# Altium PCB WX0.012.992PCB-4.2.PcbDoc
Units mil, origin at the board's own origin, x right, y up, seen from the top; angles counter-clockwise.
Board outline 2570 x 3580 mil, 2 copper layers (Top Layer, Bottom Layer); 28 components, 15 nets, 53 pads, 151 vias.
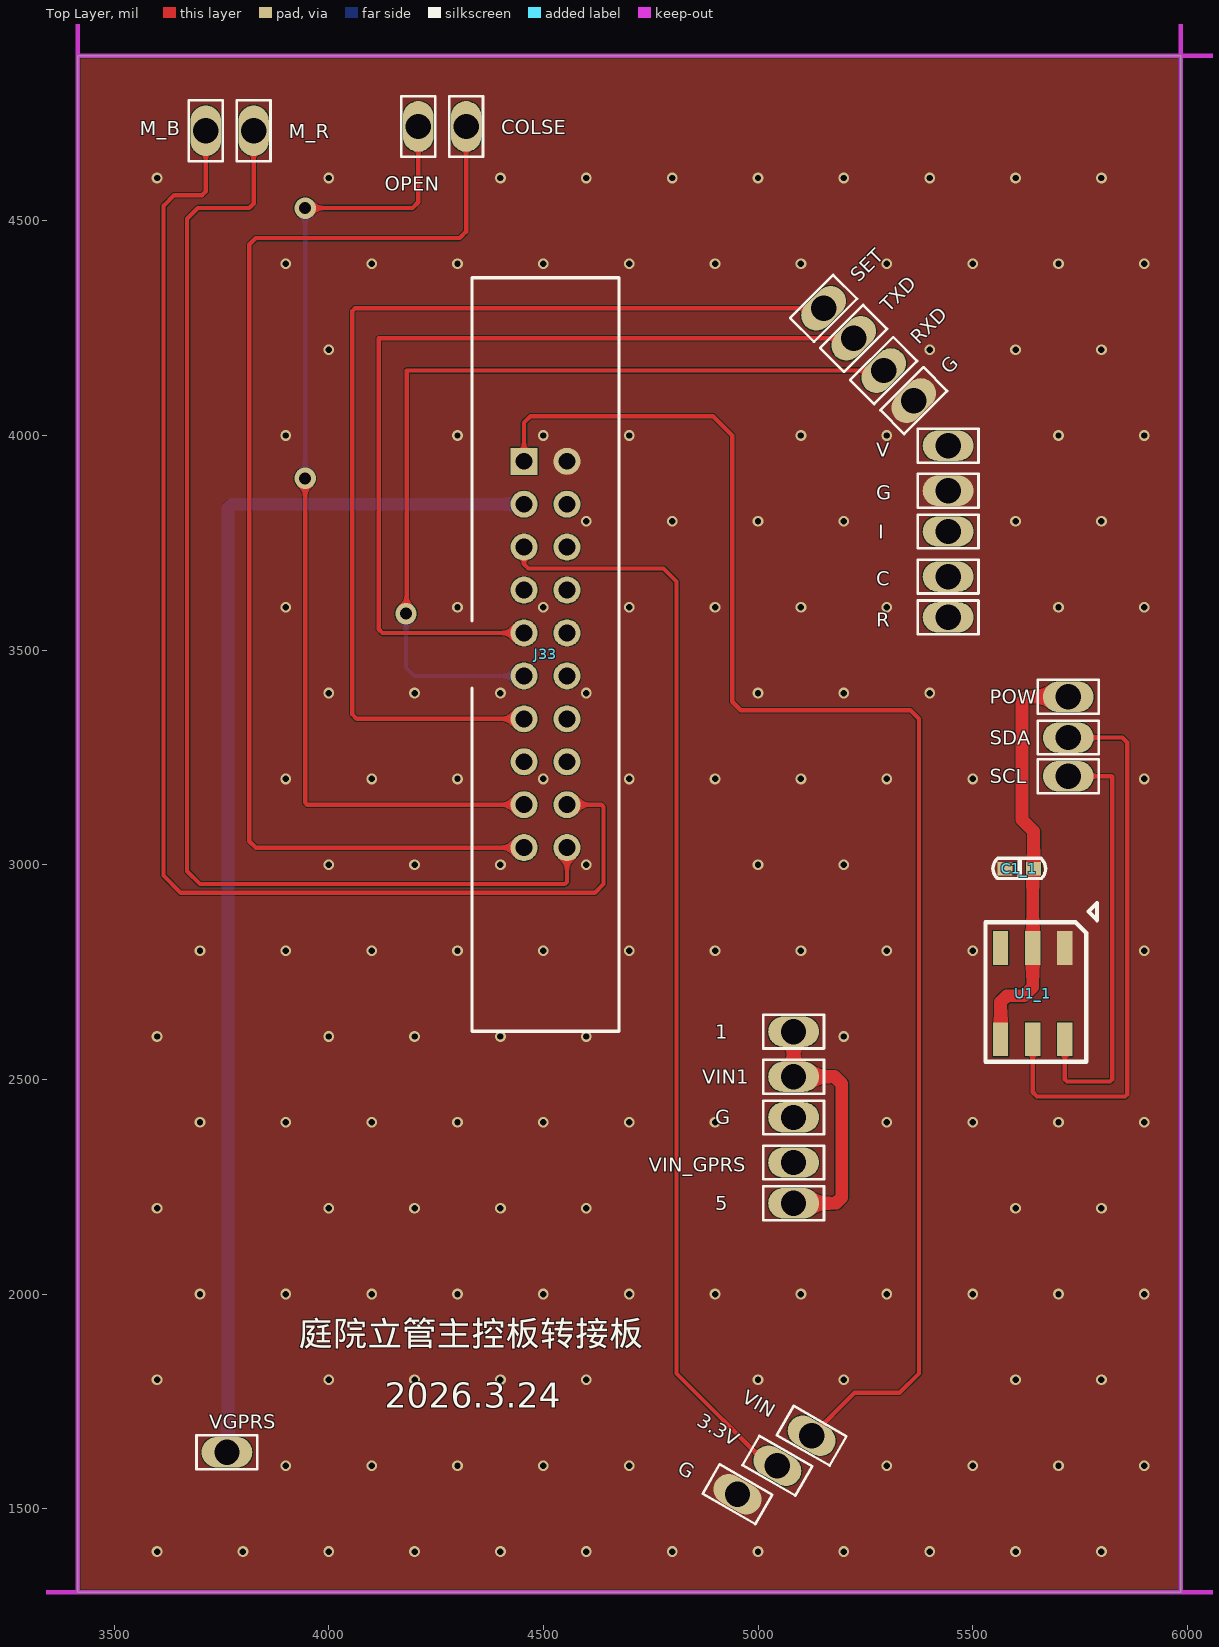
[diagram p0: Top Layer view]
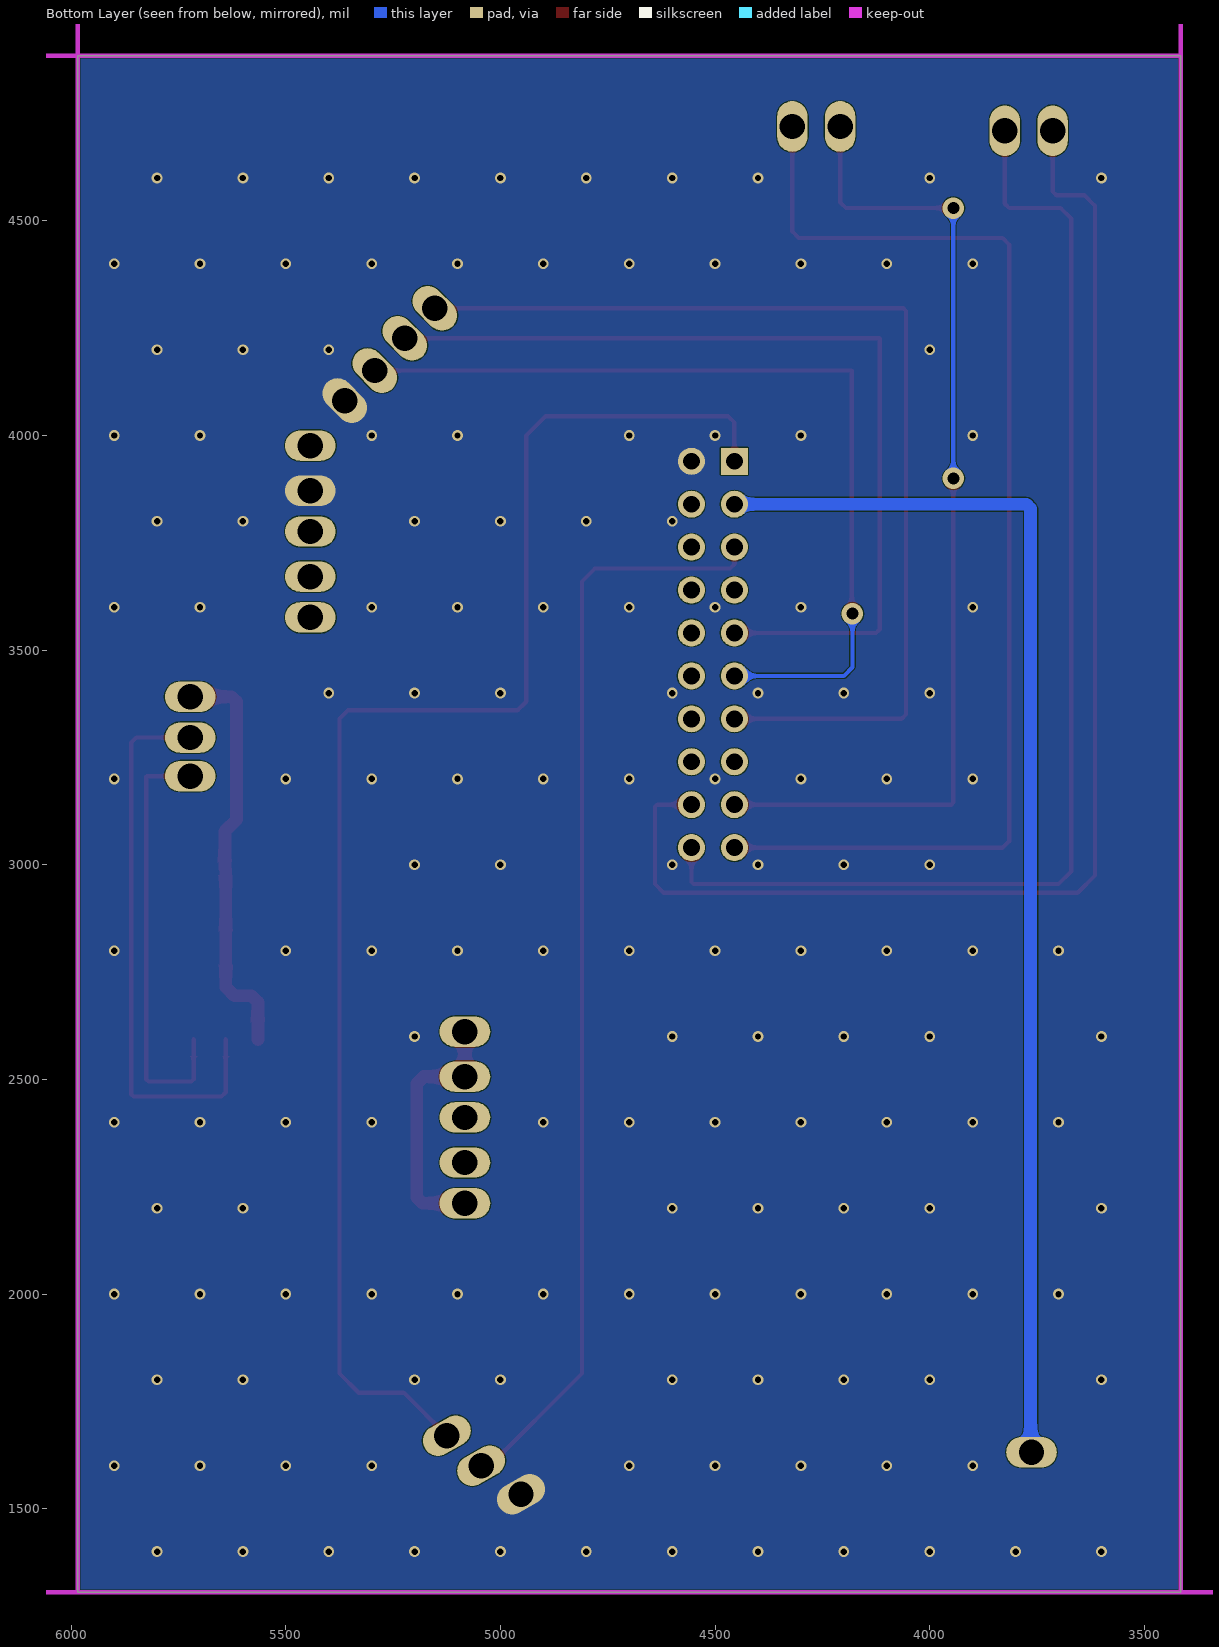
[diagram p1: Bottom Layer view, seen from below]

## Layer stack, top to bottom
Top Solder: solder mask 0.4, Solder Resist, Dk 3.5
Top Layer: signal copper 1.4
Dielectric 1: dielectric 12.6, FR-4, Dk 4.8
Bottom Layer: signal copper 1.4
Bottom Solder: solder mask 0.4, Solder Resist, Dk 3.5

## Board outline
3415,1305 5985,1305 5985,4885 3415,4885

## Design rules (kind name [scope] priority, off if disabled: settings)
Clearance [All] p1: gap=2 ignorepadtopadclearanceinfootprint=FALSE
ComponentClearance [All] p1: gap=2 collisioncheckmode=3 verticalgap=2 showdistances=FALSE
HoleToHoleClearance [All] p1: gap=2 allowstackedmicrovias=TRUE
MinimumSolderMaskSliver [All] p1: minsoldermaskwidth=2
PlaneConnect [All] p1: planeconnectstyle=Direct reliefexpansion=20 reliefentries=4 reliefconductorwidth=10 reliefairgap=10
PolygonConnect [All] p1: connectstyle=Direct reliefconductorwidth=10 reliefentries=4 polygonreliefangle="90 Angle" airgapwidth=10
RoutingVias [All] p1: holewidth=13.78 width=19.68 viastyle="Through Hole" minholewidth=13.78 minwidth=19.68 maxholewidth=28 maxwidth=50
SilkToSilkClearance [All] p1: silktosilkclearance=0
SilkToSolderMaskClearance [IsPad] p1: minsilkscreentomaskgap=0 clearancetoexposedcopper=TRUE
SolderMaskExpansion [All] p1: expansion=4
Width [All] p1: maxlimit=50 minlimit=10 preferedwidth=10
24 further rules are at their usual default settings.

## Components (designator, comment, footprint, x,y, rotation, side; value= is the part's Value field where it differs from the comment)
1 "Test Point" TP5 5082.8,2611.39 r90 top (schematic designator TP7)
3.3V "Test Point" TP5 5045,1600 r60 top (schematic designator TP7)
5 "Test Point" TP5 5082.8,2211.39 r90 top (schematic designator TP7)
C "Test Point" TP5 5442.8,3671.39 r90 top (schematic designator TP7)
C1_1 "100N/50V" CAP0603 5641.51,2991 r180 top (schematic designator C1)
COLSE "Test Point" TP5 4320,4720 r180 top (schematic designator TP7)
G "Test Point" TP5 5362.8,4081.39 r315 top (schematic designator TP7)
G "Test Point" TP5 5442.8,3871.39 r90 top (schematic designator TP7)
G "Test Point" TP5 5082.8,2411.39 r90 top (schematic designator TP7)
G "Test Point" TP5 4952.2,1533.62 r60 top (schematic designator TP7)
I "Test Point" TP5 5442.8,3776.39 r90 top (schematic designator TP7)
J33 "20Pin" DC254_2*10 4505,3490 r0 top
M_B "Test Point" TP5 3713.61,4710 r180 top (schematic designator TP7)
M_R "Test Point" TP5 3825,4710 r180 top (schematic designator TP7)
OPEN "Test Point" TP5 4208.61,4720 r180 top (schematic designator TP7)
POW "Test Point" TP5 5722.8,3391.39 r90 top (schematic designator TP7)
R "Test Point" TP5 5442.8,3576.39 r90 top (schematic designator TP7)
RXD "Test Point" TP5 5292.8,4151.39 r315 top (schematic designator TP7)
SCL "Test Point" TP5 5722.8,3206.39 r90 top (schematic designator TP7)
SDA "Test Point" TP5 5722.8,3296.39 r90 top (schematic designator TP7)
SET "Test Point" TP5 5152.8,4296.39 r315 top (schematic designator TP7)
TXD "Test Point" TP5 5222.8,4226.39 r315 top (schematic designator TP7)
U1_1 "HP6862I" HP6862 5640,2699.7 r180 top (schematic designator U1)
V "Test Point" TP5 5442.8,3976.39 r90 top (schematic designator TP7)
VGPRS "Test Point" TP5 3762.8,1631.38 r90 top (schematic designator TP7)
VIN "Test Point" TP5 5125,1670 r60 top (schematic designator TP7)
VIN1 "Test Point" TP5 5082.8,2506.39 r90 top (schematic designator TP7)
VIN_GPRS "Test Point" TP5 5082.8,2306.39 r90 top (schematic designator TP7)

## Footprints (in the part's own frame and the unit in brackets; to place one, negate y for a bottom-side part, rotate by r counter-clockwise, add the part's x,y. Pads: shape width x height; smd on the part's side, far side on the other; paste and mask are expansions set on the pad)
CAP0603 [mil]
  rect 35x31 smd: 1(-0.49,0) 2(66.51,0)
  silkscreen extent -29,-24 94,23, body extent 1,-15 72,15, height 20
DC254_2*10 [mm]
  rect 1.6x1.6 hole 1: 1(-1.27,11.43)
  round 1.6 hole 1: 2(1.27,11.43) 3(-1.27,8.89) 4(1.27,8.89) 5(-1.27,6.35) 6(1.27,6.35) 7(-1.27,3.81) 8(1.27,3.81) 9(-1.27,1.27) 10(1.27,1.27) 11(-1.27,-1.27) 12(1.27,-1.27) 13(-1.27,-3.81) 14(1.27,-3.81) 15(-1.27,-6.35) 16(1.27,-6.35) 17(-1.27,-8.89) 18(1.27,-8.89) 19(-1.27,-11.43) 20(1.27,-11.43)
  silkscreen extent -4.35,-22.3 4.35,22.3
HP6862 [mm]
  rect 0.9x2 smd: 1(-1.9,-2.7) 2(0,-2.7) 3(1.9,-2.7) 4(1.9,2.7) 5(0,2.7) 6(-1.9,2.7)
  silkscreen extent -3.8,-5.37 2.8,4.03
TP5 [mm]
  oval 1.8x3 hole 1.5: 1(0,0)
  silkscreen extent -1,-1.8 1,1.8

## Part data
1 3.3V 5 C COLSE G G G G I M_B M_R OPEN POW R RXD SCL SDA SET TXD V VGPRS VIN VIN1 VIN_GPRS: library part "Test Point  PASS", "测试点"
C1_1: "100N/50V，±10%，0603", Part Name=0603贴片电容, Part Number=101020103-0021, ID=34
J33: library part 1010902-0139, "DC2 2.54mm 2x10pin,2.54mm间距，2x10pin，32×8.55×27.5mm,母头,双排,双排牛角座", Part Name=DC牛角座, ID=4, Part Number=1010902-0139, SMD/DIP=DIP

## Via types
v1: diameter 25, hole 15, Top Layer to Bottom Layer, tented both sides, 148 vias
v2: diameter 50, hole 28, Top Layer to Bottom Layer, tented both sides, 3 vias

## Nets (pads, with @x,y where several pads share a name; then routed paths per layer and width w, separated by ;. In a path a pad name is that pad's centre, name@x,y a point inside that pad or via, vN(x,y) a via of type N, cw(c..) or ccw(c..) an arc to the next point about the centre after c; other vN are vias at no path point)
3.3v: 3.3V.1 J33.5 | length 2580.6
  Top Layer w10: J33.5 4455,3700 4465,3690 4780,3690 4810,3660 4810,1815 5025,1600 3.3V.1
CLOSE: COLSE.1 J33.19 | length 2798.6
  Top Layer w10: COLSE.1 4320,4475 4305,4460 3830,4460 3815,4445 3815,3055 3830,3040 J33.19
GND: C1_1.2 G.1@4952.2,1533.62 G.1@5362.8,4081.39 G.1@5442.8,3871.39 J33.2 U1_1.1
  other v1: 3600,1400 3800,1400 4000,1400 4200,1400 4400,1400 4600,1400 4800,1400 5000,1400 5200,1400 5400,1400 5600,1400 5800,1400 3900,1600 4100,1600 4300,1600 4500,1600 4700,1600 5300,1600 5500,1600 5700,1600 5900,1600 3600,1800 4000,1800 4200,1800 4400,1800 4600,1800 5000,1800 5200,1800 5600,1800 5800,1800 3700,2000 3900,2000 4100,2000 4300,2000 4500,2000 4700,2000 4900,2000 5100,2000 5300,2000 5500,2000 5700,2000 5900,2000 3600,2200 4000,2200 4200,2200 4400,2200 4600,2200 5600,2200 5800,2200 3700,2400 3900,2400 4100,2400 4300,2400 4500,2400 4700,2400 4900,2400 5300,2400 5500,2400 5700,2400 5900,2400 3600,2600 4000,2600 4200,2600 4400,2600 4600,2600 5200,2600 3700,2800 3900,2800 4100,2800 4300,2800 4500,2800 4700,2800 4900,2800 5100,2800 5300,2800 5500,2800 5900,2800 4000,3000 4200,3000 4400,3000 4600,3000 5000,3000 5200,3000 3900,3200 4100,3200 4300,3200 4500,3200 4700,3200 4900,3200 5100,3200 5300,3200 5500,3200 5900,3200 4000,3400 4200,3400 4400,3400 4600,3400 5000,3400 5200,3400 5400,3400 3900,3600 4300,3600 4500,3600 4700,3600 4900,3600 5100,3600 5300,3600 5700,3600 5900,3600 4600,3800 4800,3800 5000,3800 5200,3800 5600,3800 5800,3800 3900,4000 4300,4000 4500,4000 4700,4000 5100,4000 5300,4000 5700,4000 5900,4000 4000,4200 5400,4200 5600,4200 5800,4200 3900,4400 4100,4400 4300,4400 4500,4400 4700,4400 4900,4400 5100,4400 5300,4400 5500,4400 5700,4400 5900,4400 3600,4600 4000,4600 4400,4600 4600,4600 4800,4600 5000,4600 5200,4600 5400,4600 5600,4600 5800,4600
M_B: J33.18 M_B.1 | length 3130.8
  Top Layer w10: M_B.1 3713.61,4568.61 3705,4560 3640,4560 3615,4535 3615,2975 3655,2935 4620,2935 4640,2955 4640,3135 4635,3140 J33.18
M_R: J33.20 M_R.1 | length 2839
  Top Layer w10: M_R.1 3825,4540 3815,4530 3695,4530 3670,4505 3670,2985 3700,2955 4550,2955 4555,2960 J33.20
OPEN: J33.17 OPEN.1 | length 2342.7
  Top Layer w10: v2(3945,3900) 3945,3145 3950,3140 J33.17 ; v2(3945,4530) 4195,4530 4208.61,4543.61 OPEN.1
  Bottom Layer w10: v2(3945,3900) v2(3945,4530)
POW: C1_1.1 POW.1 U1_1.2 U1_1.4 | length 965.5
  Top Layer w30: U1_1.4 5565.2,2680.2 5580,2695 5620,2695 5640,2715 U1_1.2 5640,2989 C1_1.1 5642,3078 5615,3105 5615,3380 5626.39,3391.39 POW.1
RXD: J33.11 RXD.1 | length 2086.7
  Top Layer w10: v2(4180,3585) 4181.39,3586.39 4181.39,4151.39 RXD.1
  Bottom Layer w10: v2(4180,3585) 4180,3460 4200,3440 J33.11
SCL: SCL.1 U1_1.6 | length 1015.4
  Top Layer w10: U1_1.6 5714.8,2500.2 5720,2495 5820,2495 5825,2500 5825,3205 5823.61,3206.39 SCL.1
SDA: SDA.1 U1_1.5 | length 1311.5
  Top Layer w10: U1_1.5 5640,2470 5650,2460 5855,2460 5860,2465 5860,3285 5848.61,3296.39 SDA.1
SET: J33.13 SET.1 | length 2444.6
  Top Layer w10: J33.13 4065,3340 4055,3350 4055,4290 4061.39,4296.39 SET.1
TXD: J33.9 TXD.1 | length 2126.4
  Top Layer w10: J33.9 4125,3540 4116.39,3548.61 4116.39,4226.39 TXD.1
VGARS: J33.3 VGPRS.1 | length 2893.7
  Bottom Layer w30: VGPRS.1 3765,1633.58 3765,3830 3775,3840 J33.3
VIN: J33.1 VIN.1 | length 3506.5
  Top Layer w10: J33.1 4455,4030 4470,4045 4895,4045 4940,4000 4940,3380 4960,3360 5355,3360 5375,3340 5375,1815 5330,1770 5225,1770 VIN.1
VIN1: 1.1 5.1 VIN1.1 | length 606.8
  Top Layer w30: 5.1 5181.39,2211.39 5195,2225 5195,2490 5178.61,2506.39 VIN1.1 1.1
pads on no net: C.1 G.1@5082.8,2411.39 I.1 J33.4 J33.6 J33.7 J33.8 J33.10 J33.12 J33.14 J33.15 J33.16 R.1 U1_1.3 V.1 VIN_GPRS.1

## Polygon pours and split planes (outlines as drawn)
GND on Top Layer "Top Layer-No Net" (solid, remove dead copper, pour order 3): 3415,1305 5985,1305 5985,4885 3415,4885
GND on Bottom Layer "Top Layer-No Net1" (solid, remove dead copper, pour order 4): 3415,1305 5985,1305 5985,4885 3415,4885

## Keep-outs
Keep-Out Layer:
  lines w10: 3415,1305 3296.9,1305 3296.9,8465 3415,8465 ; 3415,1305 5985,1305 ; 3415,1305 3415,4885 ; 3415,4885 3415,8465 ; 3415,4885 5985,4885 ; 3415,4885 5985,4885 ; 3415,8465 5985,8465 ; 5985,1305 5985,4885 ; 5985,1305 8555,1305 ; 5985,1305 5985,4885 ; 5985,4885 5985,8465 ; 5985,4885 8555,4885 ; 5985,4885 5985,8465 ; 5985,4885 8555,4885 ; 5985,8465 8555,8465 ; 8555,1305 8673.1,1305 8673.1,8465 8555,8465 ; 8555,1305 8555,4885 ; 8555,4885 8555,8465

## Silkscreen, mask and mechanical layers (free items; w line width, h text height)
Top Overlay:
  text "庭院立管主控板转接板" at 3930,1860 h100
  text "2026.3.24" at 4130,1715 h100